# EAGLE board Beton_Ajek_v1 (EAGLE 9.7.0)

Size 119.36 x 89.84 mm. Coordinates in mm from the lower left corner, seen from the top.
Outline: 0,0 119.36,0 119.36,89.84 0,89.84 0,0
Copper layers (1*16): Top / Bottom
Stack-up Default Layer Stack: Top User Defined 0.035mm / Dielectric-1 User Defined 1.5mm / Bottom User Defined 0.035mm
Design rules "default": minimum track width 6mil, minimum drill 0.35mm, track to track 6mil, track to pad 6mil, pad to pad 6mil, via to via 6mil, smd to smd 6mil, copper to edge 40mil, drill to drill 6mil, minimum pad ring 10mil, minimum via ring 8mil, stop-mask expansion 4mil, vias tented up to drill 0mil, thermal gap 10mil

## Footprints (pad centres in the part's own frame; a part is rotated, then mirrored left to right if it is on the bottom)
AK300/2 = drill 1.321 long: 1 -2.515,0; 2 2.489,0
TO220H = drill 1.118 long: 1 -2.54,-10.16; 2 0,-10.16; 3 2.54,-10.16 | hole 3.302: 0,4.826
SOT223 = smd 1.219 x 2.235: 1 -2.311,-3.099; 2 0,-3.099; 3 2.311,-3.099 | smd 3.6 x 2.2: 4 0,3.099
C075-032X103 = drill 0.914 octagon: 1 -3.81,0; 2 3.81,0
1X04 = drill 1.016 long: 1 -3.81,0; 2 -1.27,0; 3 1.27,0; 4 3.81,0
0207/10 = drill 0.813 octagon: 1 -5.08,0; 2 5.08,0
LED5MM = drill 0.813 octagon: A -1.27,0; K 1.27,0
1X05 = drill 1.016 long: 1 -5.08,0; 2 -2.54,0; 3 0,0; 4 2.54,0; 5 5.08,0
1X06 = drill 1.016 long: 1 -6.35,0; 2 -3.81,0; 3 -1.27,0; 4 1.27,0; 5 3.81,0; 6 6.35,0
1X07 = drill 1.016 long: 1 -7.62,0; 2 -5.08,0; 3 -2.54,0; 4 0,0; 5 2.54,0; 6 5.08,0; 7 7.62,0
1X03 = drill 1.016 long: 1 -2.54,0; 2 0,0; 3 2.54,0
TO92 = drill 0.813 octagon: 1 1.27,0; 2 0,1.905; 3 -1.27,0
ESP32-DEVKITV1 = drill 1 pad 1.93: 1 -22.87,-13.54; 2 -20.33,-13.54; 3 -17.79,-13.54; 4 -15.25,-13.54; 5 -12.71,-13.54; 6 -10.17,-13.54; 7 -7.63,-13.54; 8 -5.09,-13.54; 9 -2.55,-13.54; 10 -0.01,-13.54; 11 2.53,-13.54; 12 5.07,-13.54; 13 7.61,-13.54; 14 10.15,-13.54; 15 12.69,-13.54; 16 12.69,11.23; 17 10.15,11.23; 18 7.61,11.23; 19 5.07,11.23; 20 2.53,11.23; 21 -0.01,11.23; 22 -2.55,11.23; 23 -5.09,11.23; 24 -7.63,11.23; 25 -10.17,11.23; 26 -12.71,11.23; 27 -15.25,11.23; 28 -17.79,11.23; 29 -20.33,11.23; 30 -22.87,11.23

## Placement (x,y rotation side)
12VIN  [AK300/2]  109.22,81.28 90 top
7805_SUPPLY  7805T  [TO220H]  78.74,81.28 90 top
AMS1117_SUPPLY  [SOT223]  74.93,68.58 270 bottom
C3V3  [C075-032X103]  53.34,68.58 90 top
C5V  [C075-032X103]  88.9,68.58 90 top
C12V  [C075-032X103]  97.79,80.01 90 top
CALIPER  [1X04]  52.07,17.02 0 top
CLED3V3  [0207/10]  53.34,81.28 270 top
LCD_CRYSTAL  [1X04]  111.76,33.02 180 top
LED3V3  [LED5MM]  63.5,79.27 90 top
MAX6675_TE1  [1X05]  110.49,58.42 180 top
MAX6675_TE2  [1X05]  110.49,48.26 180 top
MICROSD  [1X06]  108.69,26.67 180 top
RBCLK  [0207/10]  54.91,45.72 270 top
RBDATA  [0207/10]  49.1,27.2 270 top
RCCLK  [0207/10]  49.53,45.72 270 top
RCDATA  [0207/10]  54.61,26.67 270 top
RTC_DATA  [1X05]  110.49,39.37 0 top
RTC_PENJEPIT  [1X07]  -26.67,52.07 0 top  (outside the outline)
RVDIV1  [0207/10]  48.26,8.89 90 top
RVDIV2  [0207/10]  54.61,8.69 270 top
SELECTOR_SUPPLY_3V3  [1X03]  63.5,68.58 270 top
SELECTOR_SUPPLY_5V  [1X03]  99.06,68.58 270 top
TCLK  BC547  [TO92]  52.2,55.5 0 top
TDATA  BC547  [TO92]  52.07,36.83 0 top
U$1  ESP32DEVKITV1  [ESP32-DEVKITV1]  80.01,24.13 270 top

## Library data of the parts
12VIN = con-ptr500
7805_SUPPLY = adafruit
AMS1117_SUPPLY = SparkFun-IC-Power; PROD_ID: VREG-08170
C3V3 C5V C12V = rcl; SPICEPREFIX: C
CALIPER LCD_CRYSTAL MAX6675_TE1 MAX6675_TE2 MICROSD RTC_DATA RTC_PENJEPIT SELECTOR_SUPPLY_3V3 SELECTOR_SUPPLY_5V = pinhead
CLED3V3 RBCLK RBDATA RCCLK RCDATA RVDIV1 RVDIV2 = rcl; SPICEPREFIX: R
LED3V3 = led
TCLK TDATA = transistor
U$1 = ESP32-DEVKITV1

## Nets
1V5: CALIPER.1 RVDIV1.1 RVDIV2.2
3V3: RCCLK.2 RCDATA.2 RVDIV1.2 SELECTOR_SUPPLY_3V3.2
3V3_ESP: SELECTOR_SUPPLY_3V3.3 U$1.1
3V3_SUPPLY: AMS1117_SUPPLY.2 AMS1117_SUPPLY.4 C3V3.1 LED3V3.A SELECTOR_SUPPLY_3V3.1
5V: LCD_CRYSTAL.2 MAX6675_TE1.2 MAX6675_TE2.2 MICROSD.2 RTC_DATA.4 SELECTOR_SUPPLY_5V.2
5V_ESP: SELECTOR_SUPPLY_5V.3 U$1.30
5V_SUPPLY: 7805_SUPPLY.3 AMS1117_SUPPLY.3 C5V.1 SELECTOR_SUPPLY_5V.1
CHIP_SELECT_USD: MICROSD.6 U$1.4
CLK_CALIPER: RCCLK.1 TCLK.3 U$1.3
CLK_IN: CALIPER.2 RBCLK.2
CS_TE1: MAX6675_TE1.4 U$1.5
CS_TE2: MAX6675_TE2.4 U$1.24
DATA_CALIPER: RCDATA.1 TDATA.3 U$1.19
DATA_IN: CALIPER.3 RBDATA.2
GND: 12VIN.2 7805_SUPPLY.2 AMS1117_SUPPLY.1 C3V3.2 C5V.2 C12V.2 CALIPER.4 CLED3V3.2 LCD_CRYSTAL.1 MAX6675_TE1.1 MAX6675_TE2.1 MICROSD.1 RTC_DATA.5 RVDIV2.1 TCLK.1 TDATA.1 U$1.2 U$1.28
MISO_USD: MICROSD.3 U$1.10
MOSI_USD: MICROSD.4 U$1.15
N$1: 12VIN.1 7805_SUPPLY.1 C12V.1
N$2: RBCLK.1 TCLK.2
N$4: U$1.28
N$5: U$1.27
N$9: U$1.23
N$12: U$1.20
N$13: CLED3V3.1 LED3V3.K
N$14: U$1.18
N$15: U$1.17
N$16: U$1.16
N$18: RBDATA.1 TDATA.2
N$22: U$1.6
N$23: U$1.7
N$24: U$1.8
N$28: U$1.12
N$29: U$1.13
N$52: RTC_DATA.1
SCK_TE1: MAX6675_TE1.3 U$1.22
SCK_TE2: MAX6675_TE2.3 U$1.24
SCK_USD: MICROSD.5 U$1.9
SCL: LCD_CRYSTAL.4 RTC_DATA.2 U$1.14
SDA: LCD_CRYSTAL.3 RTC_DATA.3 U$1.11
SO_TE1: MAX6675_TE1.5 U$1.21
SO_TE2: MAX6675_TE2.5 U$1.26

## Tracks (layer width: path | path; a pad name or v marks a point on that pad's centre or on a via)
1V5  (2 unrouted)
3V3  (3 unrouted)
3V3_ESP  (1 unrouted)
3V3_SUPPLY  (4 unrouted)
5V  (5 unrouted)
5V_ESP  (1 unrouted)
5V_SUPPLY  (3 unrouted)
CHIP_SELECT_USD  (1 unrouted)
CLK_CALIPER  (2 unrouted)
CLK_IN  (1 unrouted)
CS_TE1  (1 unrouted)
CS_TE2  (1 unrouted)
DATA_CALIPER  (2 unrouted)
DATA_IN  (1 unrouted)
GND  (17 unrouted)
MISO_USD  (1 unrouted)
MOSI_USD  (1 unrouted)
N$1  (2 unrouted)
N$2  (1 unrouted)
N$13  (1 unrouted)
N$18  (1 unrouted)
SCK_TE1  (1 unrouted)
SCK_TE2  (1 unrouted)
SCK_USD  (1 unrouted)
SCL  (2 unrouted)
SDA  (2 unrouted)
SO_TE1  (1 unrouted)
SO_TE2  (1 unrouted)
(copper drawn outside any net)
  shapes: Top area x2